# EAGLE board cable-adapter-24 (EAGLE 6.5.0)
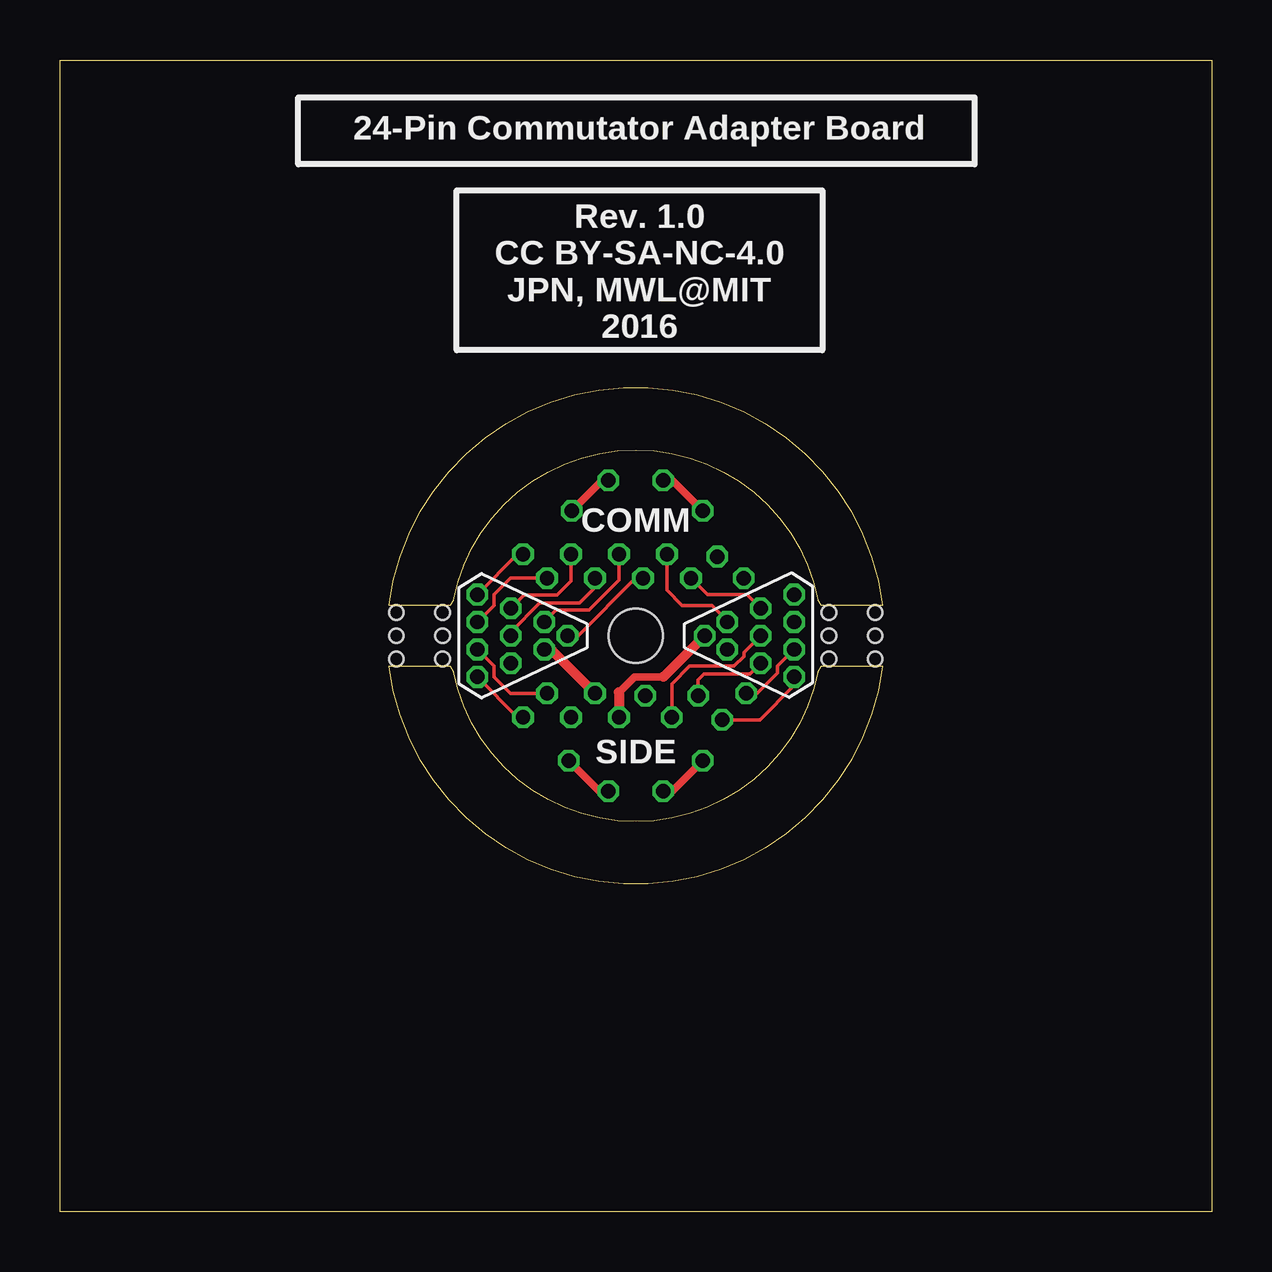
[diagram p0: board, top side]
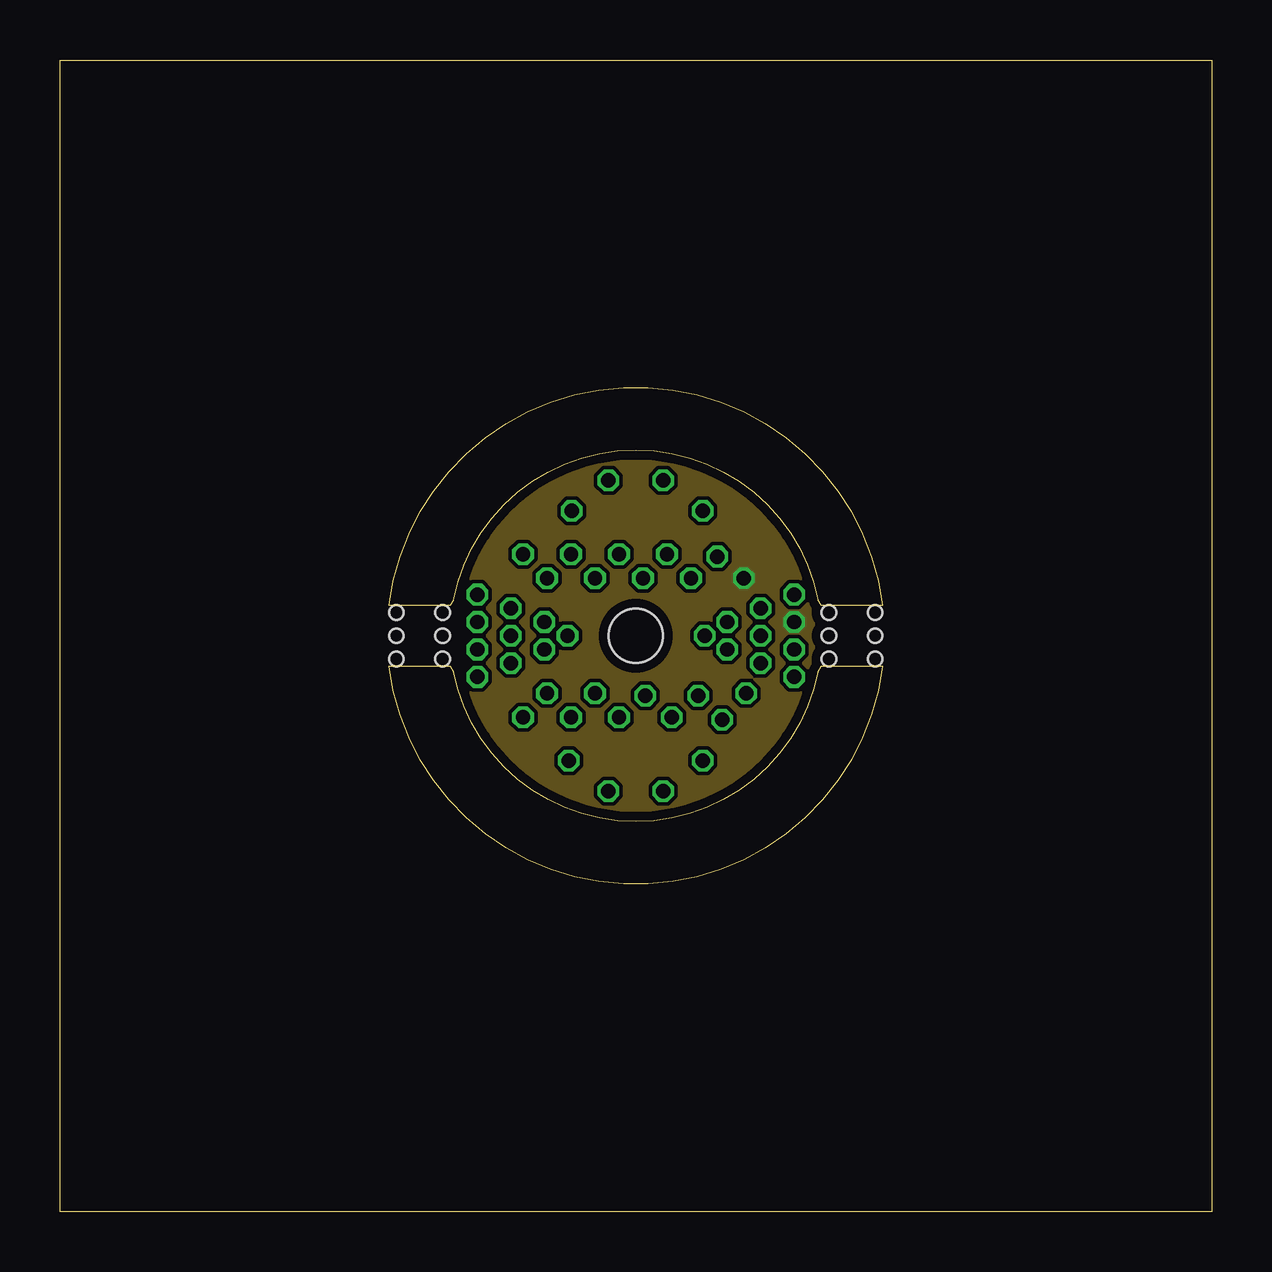
[diagram p1: board, inner layer Route2]
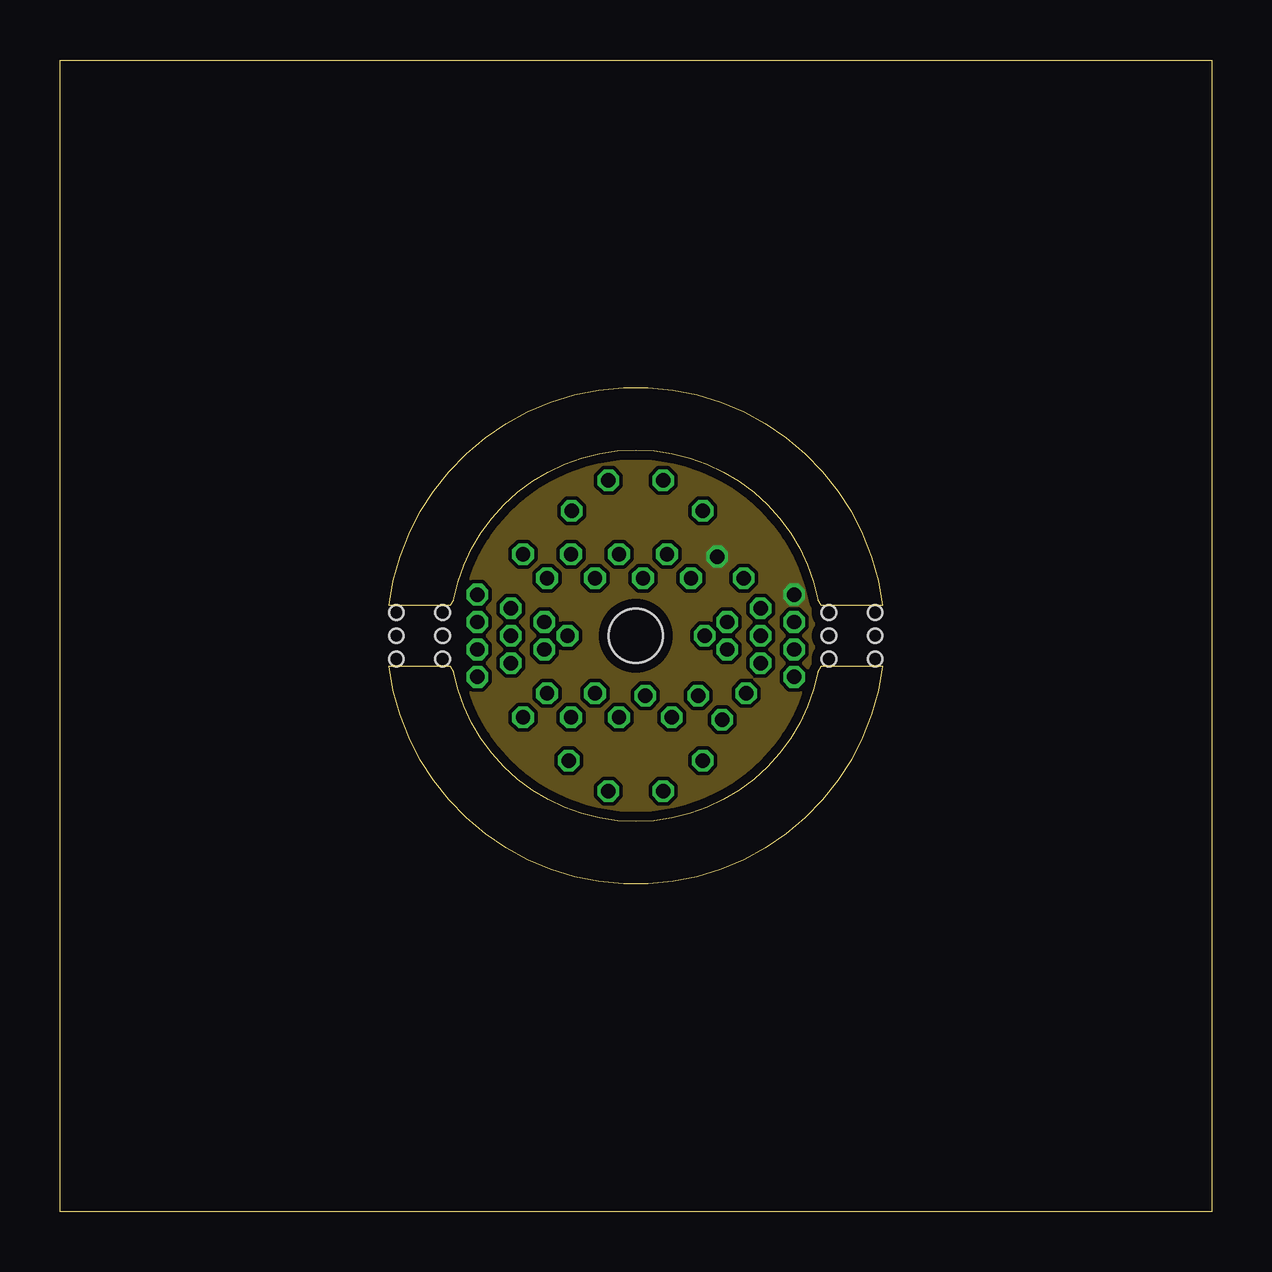
[diagram p2: board, inner layer Route15]
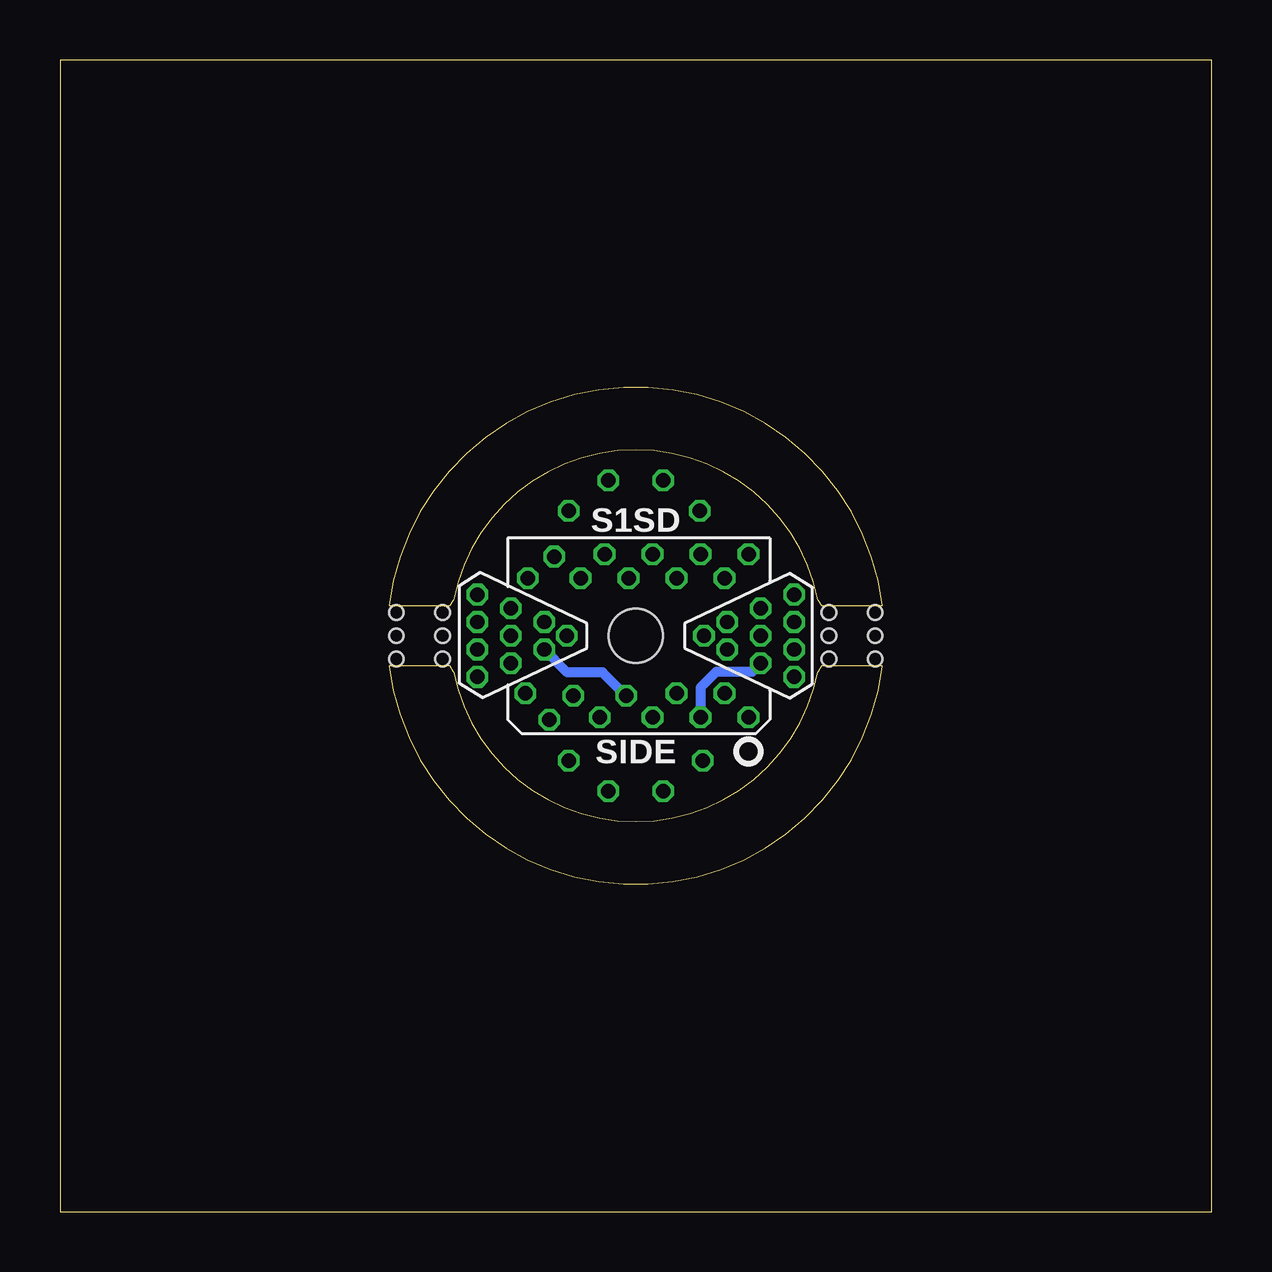
[diagram p3: board, bottom side, seen from below]

Size 48 x 48 mm. Coordinates in mm from the lower left corner, seen from the top.
Outline: 0,0 0,48 48,48 48,0 0,0
Outline: 16.4,25.5 16.25,25.27 13.71,25.27 arc-166 34.29,25.27 31.75,25.27 31.6,25.5 arc158 16.4,25.5
Outline: 16.25,22.73 16.4,22.5 arc158 31.6,22.5 31.75,22.73 34.29,22.73 arc-166 13.71,22.73 16.25,22.73
Copper layers (1*2*15*16): Top 0.035mm / dielectric 0.2mm / Route2 0.0175mm / dielectric 0.3mm / Route15 0.0175mm / dielectric 0.2mm / Bottom 0.035mm
Design rules "seeed-studio-4-layer": minimum track width 6mil, minimum drill 0.3mm, track to track 6mil, track to pad 6mil, pad to pad 6mil, via to via 6mil, smd to smd 0mil, copper to edge 0.4mm, drill to drill 10mil, minimum pad ring 6mil, minimum via ring 4mil, stop-mask expansion 4mil, vias tented up to drill 100mil, thermal gap 10mil
Holes 2.26 mm at 24,24
Holes 0.6 mm at 15.95,24.97 15.95,24 15.95,23.03 14.02,24.97 14.02,24 14.02,23.03 32.05,23.03 32.05,24 32.05,24.97 33.98,23.03 33.98,24 33.98,24.97

## Footprints (pad centres in the part's own frame; a part is rotated, then mirrored left to right if it is on the bottom)
SPI_WIRE+ = drill 0.6 octagon: P$1 0,0

## Placement (x,y rotation side)
_CS+  [SPI_WIRE+]  17.4,25.71 0 top
_CS-  [SPI_WIRE+]  17.4,24.57 0 top
_GND  [SPI_WIRE+]  30.6,24.57 0 top
_LED+1  [SPI_WIRE+]  18.79,22.86 0 top
_LED+2  [SPI_WIRE+]  20.19,23.43 0 top
_LED-1  [SPI_WIRE+]  26.87,24 0 top
_LED-2  [SPI_WIRE+]  27.81,23.43 0 top
_MIS04-  [SPI_WIRE+]  29.21,25.14 0 top
_MISO1+  [SPI_WIRE+]  29.21,22.86 0 top
_MISO1-  [SPI_WIRE+]  29.21,24 0 top
_MISO2+  [SPI_WIRE+]  30.6,23.43 0 top
_MISO2-  [SPI_WIRE+]  30.6,22.29 0 top
_MISO3+  [SPI_WIRE+]  17.4,23.43 0 top
_MISO3-  [SPI_WIRE+]  17.4,22.29 0 top
_MISO4+  MISO3+  [SPI_WIRE+]  27.81,24.57 0 top
_MOSI+  [SPI_WIRE+]  20.19,24.57 0 top
_MOSI-  [SPI_WIRE+]  21.16,24 0 top
_SCLK+  [SPI_WIRE+]  18.79,25.14 0 top
_SCLK-  [SPI_WIRE+]  18.79,24 0 top
_USR0  [SPI_WIRE+]  21.21,18.79 0 top
_USR1  [SPI_WIRE+]  26.79,18.79 0 top
_USR2  [SPI_WIRE+]  21.33,29.21 0 top
_USR3  [SPI_WIRE+]  26.79,29.21 0 top
_VCC  [SPI_WIRE+]  30.6,25.71 0 top
CS+  [SPI_WIRE+]  19.3,27.4 0 top
CS-  [SPI_WIRE+]  20.3,26.4 0 top
GND  [SPI_WIRE+]  28.5,26.4 0 top
LED+1  [SPI_WIRE+]  21.3,20.6 0 top
LED+2  [SPI_WIRE+]  22.3,21.6 0 top
LED-1  [SPI_WIRE+]  23.3,20.6 0 top
LED-2  [SPI_WIRE+]  24.4,21.5 0 top
MISO1+  [SPI_WIRE+]  26.6,21.5 0 top
MISO1-  [SPI_WIRE+]  25.5,20.6 0 top
MISO2+  [SPI_WIRE+]  28.6,21.6 0 top
MISO2-  [SPI_WIRE+]  27.6,20.5 0 top
MISO3+  [SPI_WIRE+]  20.3,21.6 0 top
MISO3-  [SPI_WIRE+]  19.3,20.6 0 top
MISO4+  [SPI_WIRE+]  25.3,27.4 0 top
MISO4-  [SPI_WIRE+]  26.3,26.4 0 top
MOSI+  [SPI_WIRE+]  23.3,27.4 0 top
MOSI-  [SPI_WIRE+]  24.3,26.4 0 top
SCLK+  [SPI_WIRE+]  21.3,27.4 0 top
SCLK-  [SPI_WIRE+]  22.3,26.4 0 top
USR0  [SPI_WIRE+]  22.86,17.52 0 top
USR1  [SPI_WIRE+]  25.14,17.52 0 top
USR2  [SPI_WIRE+]  22.86,30.48 0 top
USR3  [SPI_WIRE+]  25.14,30.48 0 top
VCC  [SPI_WIRE+]  27.4,27.3 0 top

## Library data of the parts
_CS+ _CS- _GND _LED+1 _LED+2 _LED-1 _LED-2 _MIS04- _MISO1+ _MISO1- _MISO2+ _MISO2- _MISO3+ _MISO3- _MISO4+ _MOSI+ _MOSI- _SCLK+ _SCLK- _USR0 _USR1-_USR3 _VCC CS+ CS- GND LED+1 LED+2 LED-1 LED-2 MISO1+ MISO1- MISO2+ MISO2- MISO3+ MISO3- MISO4+ MISO4- MOSI+ MOSI- SCLK+ SCLK- USR0 USR1-USR3 VCC = jonnew

## Nets
CS+: _CS+.P$1 CS+.P$1
CS-: _CS-.P$1 CS-.P$1
GND: _GND.P$1 GND.P$1
LED+1: _LED+1.P$1 LED+1.P$1
LED+2: _LED+2.P$1 LED+2.P$1
LED-1: _LED-1.P$1 LED-1.P$1
LED-2: _LED-2.P$1 LED-2.P$1
MIS03-: _MISO3-.P$1 MISO3-.P$1
MIS04+: _MISO4+.P$1 MISO4+.P$1
MISO1+: _MISO1+.P$1 MISO1+.P$1
MISO1-: _MISO1-.P$1 MISO1-.P$1
MISO2+: _MISO2+.P$1 MISO2+.P$1
MISO2-: _MISO2-.P$1 MISO2-.P$1
MISO3+: _MISO3+.P$1 MISO3+.P$1
MISO4-: _MIS04-.P$1 MISO4-.P$1
MOSI+: _MOSI+.P$1 MOSI+.P$1
MOSI-: _MOSI-.P$1 MOSI-.P$1
SCLK+: _SCLK+.P$1 SCLK+.P$1
SCLK-: _SCLK-.P$1 SCLK-.P$1
USR0: _USR0.P$1 USR0.P$1
USR1: _USR1.P$1 USR1.P$1
USR2: _USR2.P$1 USR2.P$1
USR3: _USR3.P$1 USR3.P$1
VCC: _VCC.P$1 VCC.P$1

## Tracks (layer width: path | path; a pad name or v marks a point on that pad's centre or on a via)
CS+
  Top 0.152: _CS+.P$1 19.08,27.4 CS+.P$1
CS-
  Top 0.152: _CS-.P$1 18.09,25.27 18.09,25.72 18.77,26.4 CS-.P$1
GND
  pour Route2 (no thermals): -6.48,54.48 54.48,54.48 54.48,-9.02 -6.48,-9.02
LED+1
  Bottom 0.406: LED+1.P$1 21.3,21.84 20.64,22.5 19.15,22.5 _LED+1.P$1
LED+2
  Top 0.406: _LED+2.P$1 20.47,23.43 LED+2.P$1
LED-1
  Top 0.305: 25.16,22.29 23.94,22.29 23.3,21.64
  Top 0.406: 23.3,21.64 LED-1.P$1 | 25.16,22.29 _LED-1.P$1
LED-2
  Bottom 0.406: LED-2.P$1 25.38,22.48 26.86,22.48 _LED-2.P$1
MIS03-
  Top 0.152: _MISO3-.P$1 19.08,20.6 MISO3-.P$1
MIS04+
  Top 0.152: MISO4+.P$1 25.3,25.91 25.93,25.27 27.18,25.27 27.81,24.64 _MISO4+.P$1
MISO1+
  Top 0.152: MISO1+.P$1 26.6,22.16 26.85,22.41 28.76,22.41 _MISO1+.P$1
MISO1-
  Top 0.152: MISO1-.P$1 25.5,21.99 26.24,22.73 28.1,22.73 28.51,23.14 28.51,23.3 _MISO1-.P$1
MISO2+
  Top 0.152: MISO2+.P$1 29.06,21.6 29.91,22.45 29.91,22.73 _MISO2+.P$1
MISO2-
  Top 0.152: _MISO2-.P$1 30.6,21.93 29.17,20.5 MISO2-.P$1
MISO3+
  Top 0.152: MISO3+.P$1 18.77,21.6 18.09,22.28 18.09,22.73 _MISO3+.P$1
MISO4-
  Top 0.152: _MIS04-.P$1 28.64,25.71 26.99,25.71 MISO4-.P$1
MOSI+
  Top 0.152: MOSI+.P$1 23.3,26.32 22.04,25.07 20.68,25.07 _MOSI+.P$1
MOSI-
  Top 0.152: MOSI-.P$1 23.99,26.4 21.59,24 _MOSI-.P$1
SCLK+
  Top 0.152: _SCLK+.P$1 19.35,25.7 20.71,25.7 21.3,26.29 SCLK+.P$1
SCLK-
  Top 0.152: _SCLK-.P$1 18.79,24.16 20,25.37 21.66,25.37 22.3,26.01 SCLK-.P$1 22.3,26.11
USR0
  Top 0.305: _USR0.P$1 22.48,17.52 USR0.P$1
USR1
  Top 0.305: USR1.P$1 25.52,17.52 _USR1.P$1
USR2
  Top 0.305: _USR2.P$1 22.6,30.48 USR2.P$1
USR3
  Top 0.305: _USR3.P$1 25.52,30.48 USR3.P$1
VCC
  pour Route15 (no thermals): -3.94,51.94 -3.94,-6.48 51.94,-6.48 51.94,51.94

## Text on the board
tPlace: 24-Pin Commutator Adapter Board | Rev. 1.0 / CC BY-SA-NC-4.0 / JPN, MWL@MIT / 2016 | COMM | SIDE
bPlace: S1SD | SIDE